# Altium PCB vehicle_control.PcbDoc
Units mil, origin at the board's own origin, x right, y up, seen from the top; angles counter-clockwise.
Board outline 5000 x 4000 mil, 2 copper layers (Top Layer, Bottom Layer); 16 components, 18 nets, 69 pads, 16 vias.
Unrouted connection lines stored in the file: 8.
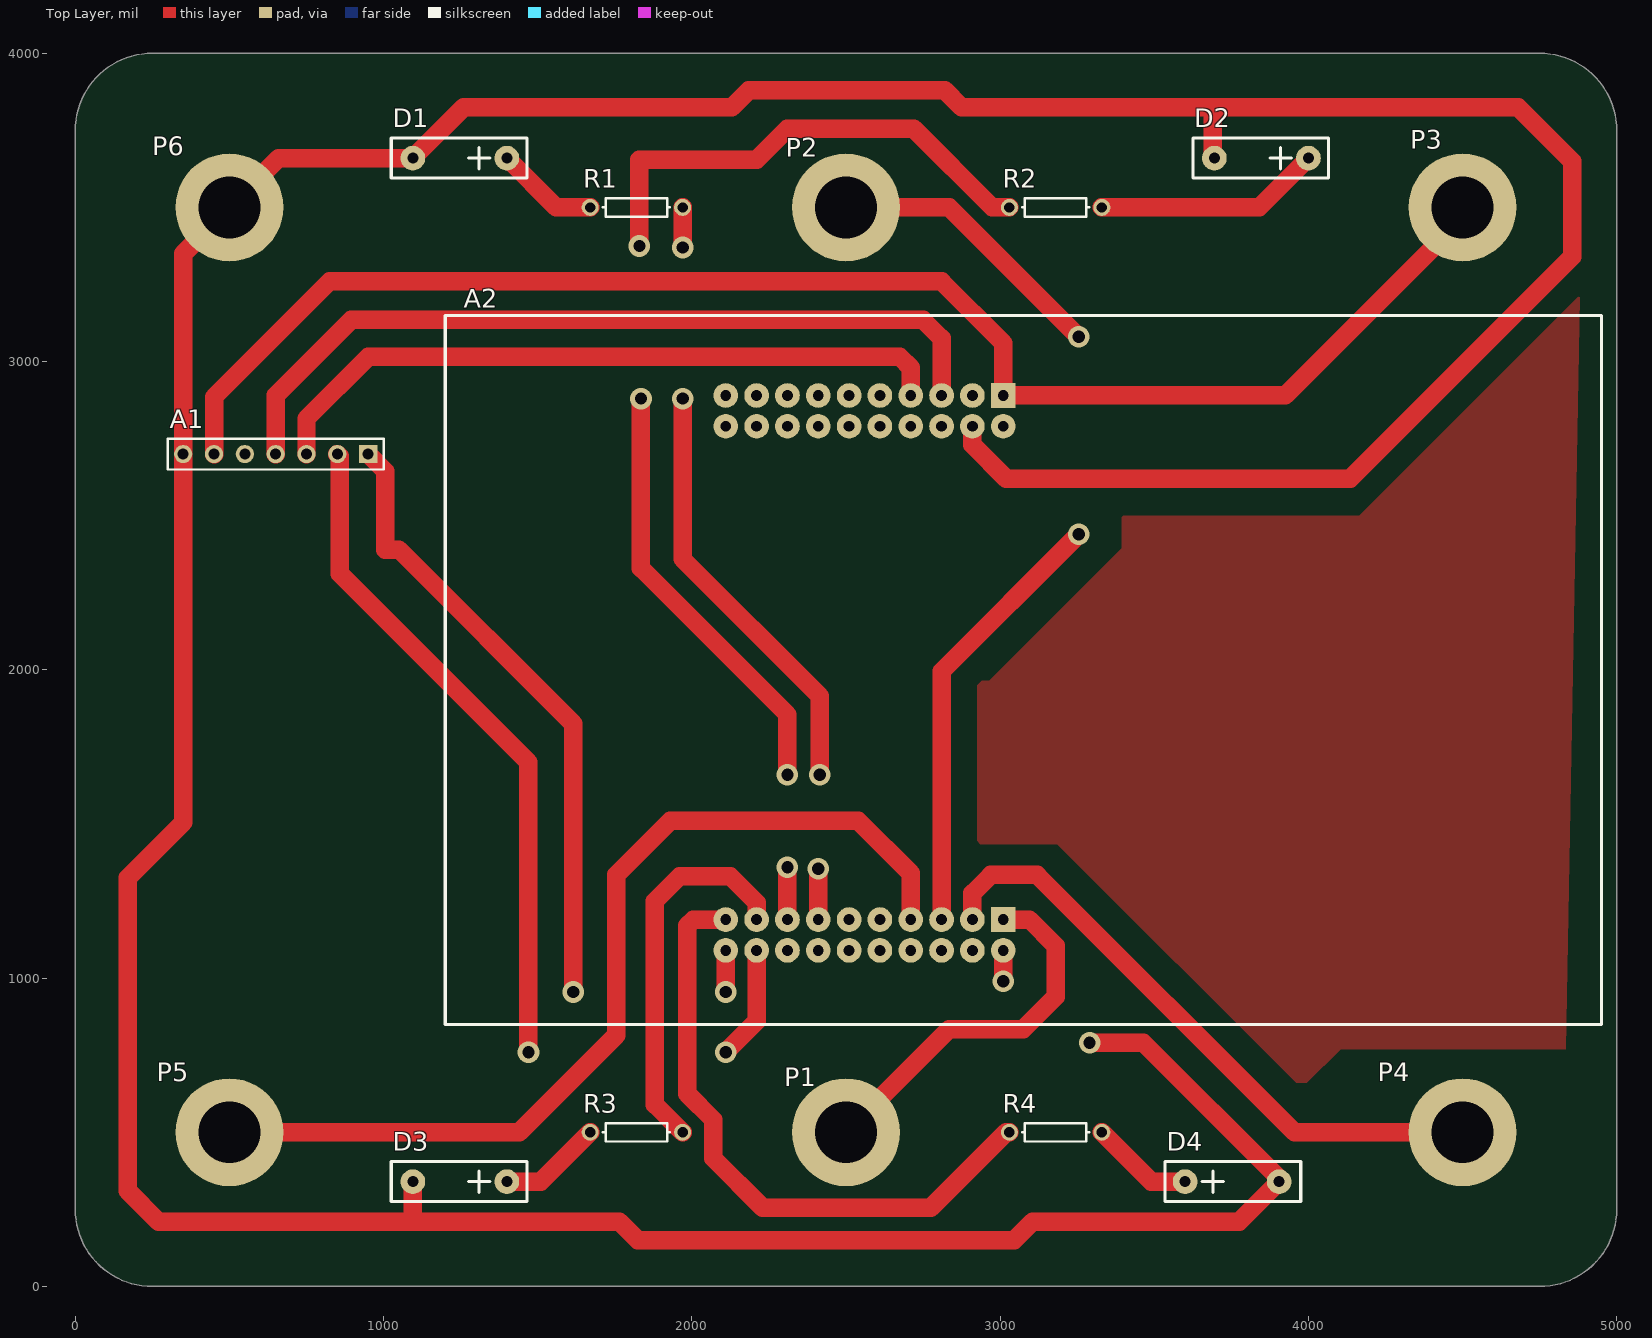
[diagram p0: Top Layer view]
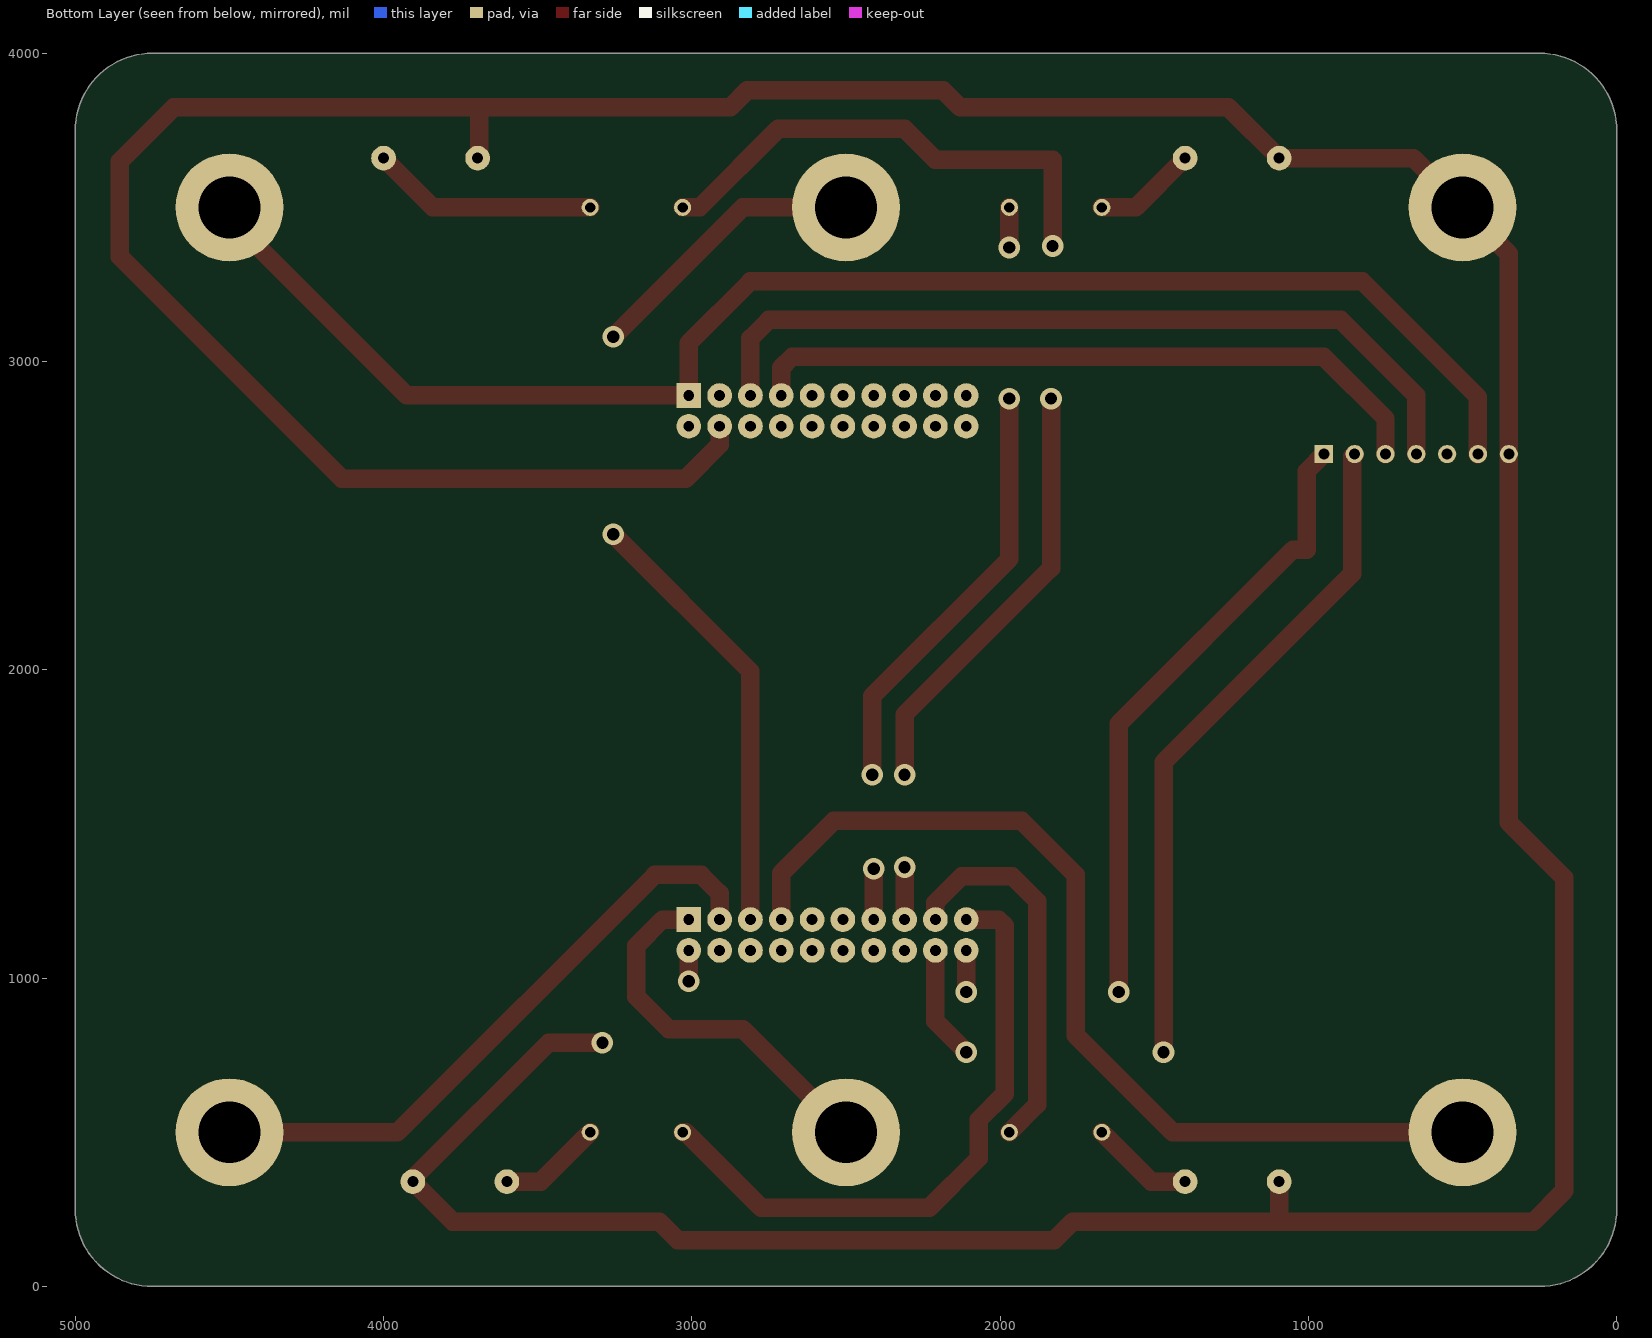
[diagram p1: Bottom Layer view, seen from below]

## Layer stack, top to bottom
Top Solder: solder mask 0.4, Solder Resist, Dk 3.5
Top Layer: signal copper 1.4
Dielectric 1: dielectric 12.6, FR-4, Dk 4.8
Bottom Layer: signal copper 1.4
Bottom Solder: solder mask 0.4, Solder Resist, Dk 3.5

## Board outline
0,250 0,3750 cw(c250,3750) 250,4000 4750,4000 cw(c4750,3750) 5000,3750 5000,250 cw(c4750,250) 4750,0 250,0 cw(c250,250)

## Design rules (kind name [scope] priority, off if disabled: settings)
Clearance [All] p1: gap=10 ignorepadtopadclearanceinfootprint=FALSE except(0: Arc-Hole Track-Hole SMDPad-Hole THPad-Hole Via-Hole Fill-Hole Poly-Hole Region-Hole Text-Hole)
PolygonConnect [All] p1: connectstyle=Relief reliefconductorwidth=10 reliefentries=4 polygonreliefangle="90 Angle" airgapwidth=10
RoomDefinition vehicle_control [InComponentClass('vehicle_control')] p1: confinementstyle=ConfineIn formatcopy=TRUE lockcomponents=FALSE outline 0,0 5000,0 5000,4000 0,4000
RoutingVias [All] p1: holewidth=28 width=50 viastyle="Through Hole" minholewidth=28 minwidth=50 maxholewidth=28 maxwidth=50
SolderMaskExpansion [All] p1: expansion=4
Width [All] p1: maxlimit=500 minlimit=10 preferedwidth=10
30 further rules are at their usual default settings.

## Components (designator, comment, footprint, x,y, rotation, side; value= is the part's Value field where it differs from the comment)
A1 "E32 (868T30D)" HDR1X7 950,2700 r180 top
A2 "MSP432" MSP432 1200,3150 r270 top locked
D1 "LED3" DIODE 1200,3660 r180 top
D2 "LED3" DIODE 3800,3660 r180 top
D3 "LED3" DIODE 1200,340 r180 top
D4 "LED3" DIODE 3800,340 r0 top
P1 "Plug" STANDOFF#1 2465,440 r0 top
P2 "Plug" STANDOFF#2 2925,2445 r0 top
P3 "Plug" STANDOFF#3 4605,3680 r0 top
P4 "Plug" STANDOFF#4 4530,410 r0 top
P5 "Plug" STANDOFF#5 360,360 r0 top
P6 "Plug" STANDOFF#6 310,3720 r0 top
R1 "Res1" AXIAL-0.3 1820,3500 r180 top value=330
R2 "Res1" AXIAL-0.3 3180,3500 r0 top value=330
R3 "Res1" AXIAL-0.3 1820,500 r180 top value=330
R4 "Res1" AXIAL-0.3 3180,500 r0 top value=330

## Footprints (in the part's own frame and the unit in brackets; to place one, negate y for a bottom-side part, rotate by r counter-clockwise, add the part's x,y. Pads: shape width x height; smd on the part's side, far side on the other; paste and mask are expansions set on the pad)
AXIAL-0.3 [mm] "Axial Device, Thru-Hole; 2 Leads; 0.3 in Pin Spacing"
  round 1.4 hole 0.85: 1(-3.81,0) 2(3.81,0)
  silkscreen extent -2.77,-0.76 2.77,0.76
DIODE [mil]
  round 80 hole 35: 1(-200,0) 2(105,0)
  silkscreen extent -265,-65 175,65
HDR1X7 [mm] "Connector; Header; 7 Position"
  rect 1.5x1.5 hole 0.9: 1(0,0)
  round 1.5 hole 0.9: 2(2.54,0) 3(5.08,0) 4(7.62,0) 5(10.16,0) 6(12.7,0) 7(15.24,0)
  silkscreen extent -1.27,-1.27 16.51,1.27
MSP432 [mil]
  rect 80x80 hole 35: 1(260,1810) 40(1960,1810)
  round 80 hole 35: 2(260,1710) 3(260,1610) 4(260,1510) 5(260,1410) 6(260,1310) 7(260,1210) 8(260,1110) 9(260,1010) 10(260,910) 11(2060,910) 12(2060,1010) 13(2060,1110) 14(2060,1210) 15(2060,1310) 16(2060,1410) 17(2060,1510) 18(2060,1610) 19(2060,1710) 20(2060,1810) 21(360,1810) 22(360,1710) 23(360,1610) 24(360,1510) 25(360,1410) 26(360,1310) 27(360,1210) 28(360,1110) 29(360,1010) 30(360,910) 31(1960,910) 32(1960,1010) 33(1960,1110) 34(1960,1210) 35(1960,1310) 36(1960,1410) 37(1960,1510) 38(1960,1610) 39(1960,1710)
  silkscreen extent 0,0 2300,3750
STANDOFF#1 [mil]
  round 350 hole 200: 1(35,60)
STANDOFF#2 [mil]
  round 350 hole 200: 1(-425,1055)
STANDOFF#3 [mil]
  round 350 hole 200: 1(-105,-180)
STANDOFF#4 [mil]
  round 350 hole 200: 1(-30,90)
STANDOFF#5 [mil]
  round 350 hole 200: 1(140,140)
STANDOFF#6 [mil]
  round 350 hole 200: 1(190,-220)

## Part data
A1: library part "SX1276 E32"
A2: "MSP432 Dev Kit Launchpad"
D1 D2 D3 D4: "Typical BLUE SiC LED", DatasheetVersion=16-Apr-2002, LatestRevisionDate=17-Dec-2003, LatestRevisionNote="PCB Footprint replaced.", PackageDescription="SM LED; 2 C-Bend Leads; Body 3.5 x 2.8 x 1.9 mm, inc leads (LxWxH typ)", PackageReference=3.5X2.8X1.9, PackageVersion=16-Apr-2002, Published=8-Jun-2000, Publisher="Altium Limited"
R1 R2 R3 R4: "Resistor", LatestRevisionDate=17-Jul-2002, LatestRevisionNote="Re-released for DXP Platform.", PackageDescription="Axial Device, Thru-Hole; 2 Leads; 0.3 in Pin Spacing", PackageReference=AXIAL-0.3, Published=8-Jun-2000, Publisher="Altium Limited"
P1 P2 P3 P4 P5 P6: LatestRevisionDate=17-Jul-2002, LatestRevisionNote="Re-released for DXP Platform.", Publisher="Altium Limited"

## Via types
v1: diameter 70, hole 40, Top Layer to Bottom Layer, 16 vias

## Nets (pads, with @x,y where several pads share a name; then routed paths per layer and width w, separated by ;. In a path a pad name is that pad's centre, name@x,y a point inside that pad or via, vN(x,y) a via of type N, cw(c..) or ccw(c..) an arc to the next point about the centre after c; other vN are vias at no path point)
3.3V: A1.6 A2.1 P3.1 | length 4916.3
  Top Layer w60: A1.6 450,2885 825,3260 2810,3260 3010,3060 A2.1 3925,2890 4500,3465 P3.1
GND: A1.7 A2.20 A2.22 D1.2 D2.2 D3.2 D4.2 P6.1 | length 15677.5
  Top Layer w60: D3.2 1095,210 ; A2.22 2910,2730 3020,2620 4135,2620 4855,3340 4855,3650 4680,3825 3690,3825 ; v1(3010,990) A2.20 ; v1(3290,790) 3465,790 3905,350 D4.2 3775,210 3105,210 3045,150 1825,150 1765,210 1095,210 ; D2.2 3690,3665 3690,3825 ; 1095,210 270,210 170,310 170,1325 350,1505 A1.7 350,3350 P6.1 660,3660 D1.2 1260,3825 2130,3825 2185,3880 2820,3880 2875,3825 3690,3825
L_BKD: A2.37 P5.1 | length 3153.4
  Top Layer w60: P5.1 1440,500 1755,815 1755,1335 1930,1510 2540,1510 2710,1340 A2.37
L_FWD: A2.38 P2.1 | length 2384.5
  Top Layer w10: A2.38 A2.38@2825,1175
  Top Layer w60: P2.1 2835,3500 v1(3255,3080) ; A2.38 2810,1995 v1(3255,2440)
"Mode Bit 0": A1.1 A2.11 | length 2181.8
  Top Layer w60: A1.1 1005,2645 1005,2390 1050,2390 1615,1825 v1(1615,955) ; v1(2110,955) A2.11
"Mode Bit 1": A1.2 A2.12 | length 2568.2
  Top Layer w60: A1.2 857.61,2692.39 857.61,2312.39 1470,1700 v1(1470,760) ; v1(2110,760) 2210,860 A2.12
NetA2_31: A2.31 R4.1 | length 2051.2
  Top Layer w60: A2.31 2005,1190 1985,1170 1985,625 2070,540 2070,415 2230,255 2775,255 3020,500 R4.1
NetA2_32: A2.32 R3.1 | length 1240.6
  Top Layer w60: R3.1 1880,590 1880,1250 1960,1330 2125,1330 2210,1245 A2.32
NetA2_33: A2.33 R2.1 | length 3213.8
  Top Layer w60: v1(1830,3375) 1830,3655 2210,3655 2310,3755 2720,3755 2975,3500 R2.1 ; v1(1835,2880) 1835,2330 2310,1855 v1(2310,1660) ; A2.33 v1(2310,1360)
NetA2_34: A2.34 R1.1 | length 1699.3
  Top Layer w60: v1(1970,2880) 1970,2360 2415,1915 v1(2415,1660) ; v1(1970,3370) R1.1 ; A2.34 v1(2410,1355)
NetD1_1: D1.1 R1.2 | length 336.3
  Top Layer w60: D1.1 1560,3500 R1.2
NetD2_1: D2.1 R2.2 | length 736.3
  Top Layer w60: R2.2 3840,3500 D2.1
NetD3_1: D3.1 R3.2 | length 336.3
  Top Layer w60: D3.1 1510,340 R3.2
NetD4_1: D4.1 R4.2 | length 336.3
  Top Layer w60: R4.2 3490,340 D4.1
R_BKD: A2.39 P4.1 | length 2045.7
  Top Layer w60: A2.39 2910,1275 2970,1335 3120,1335 3955,500 P4.1
R_FWD: A2.40 P1.1 | length 1232.5
  Top Layer w60: P1.1 2835,835 3075,835 3180,940 3180,1105 3095,1190 A2.40
UART_RX: A1.4 A2.3 | length 2661.3
  Top Layer w60: A1.4 650,2890 895,3135 2750,3135 2810,3075 A2.3
UART_TX: A1.3 A2.4 | length 2262.3
  Top Layer w60: A1.3 750,2815 950,3015 2675,3015 2710,2980 A2.4
pads on no net: A1.5 A2.2 A2.5 A2.6 A2.7 A2.8 A2.9 A2.10 A2.13 A2.14 A2.15 A2.16 A2.17 A2.18 A2.19 A2.21 A2.23 A2.24 A2.25 A2.26 A2.27 A2.28 A2.29 A2.30 A2.35 A2.36

## Polygon pours and split planes (outlines as drawn)
no net on Top Layer (solid, pour order 4): 3397.5,2497.5
no net on Top Layer (solid, pour order 2): 4880,3240 4880,3215 4165,2500 3400,2500 3395,2495 3395,2395 2965,1965 2940,1965 2925,1950 2925,1445 2935,1435 3185,1435 3960,660 3995,660 4105,770 4835,770

## Silkscreen, mask and mechanical layers (free items; w line width, h text height)
Mechanical 1:
  the board outline again, w10